# EAGLE board eurocon_board_04 (EAGLE 8.0.0)
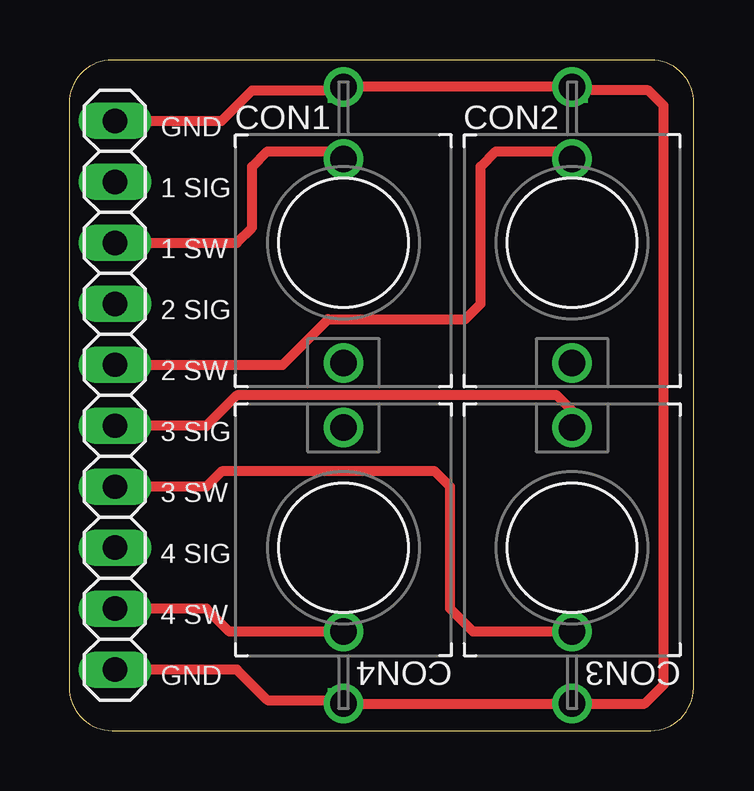
[diagram p0: board, top side]
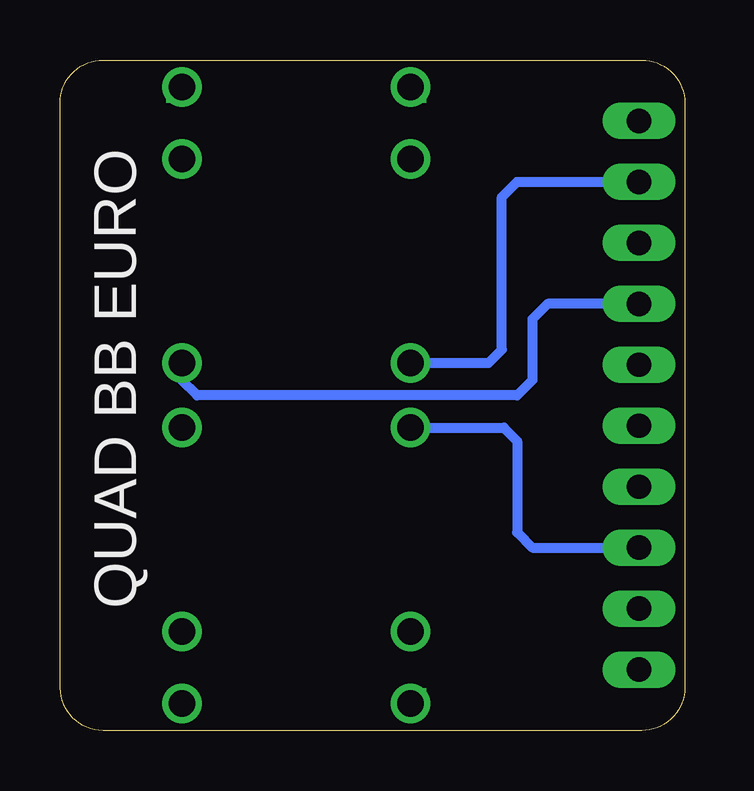
[diagram p1: board, bottom side, seen from below]

Size 26.03 x 27.94 mm. Coordinates in mm from the lower left corner, seen from the top.
Outline: 0,26.14 0,1.8 arc90 1.8,0 24.23,0 arc90 26.02,1.78 26.03,26.14 arc90 24.24,27.94 1.8,27.94 arc90 0,26.14
Copper layers (1*16): Top 0.035mm / dielectric 1.5mm / Bottom 0.035mm
Design rules "default": minimum track width 10mil, minimum drill 24mil, track to track 8mil, track to pad 8mil, pad to pad 8mil, via to via 8mil, smd to smd 8mil, copper to edge 40mil, drill to drill 8mil, minimum pad ring 10mil, minimum via ring 8mil, stop-mask expansion 4mil, vias tented up to drill 0mil, thermal gap 10mil

## Footprints (pad centres in the part's own frame; a part is rotated, then mirrored left to right if it is on the bottom)
WQP-PJ301M-12_JACK = drill 1.1: P$1_TIP 0,5; P$2_SWITCH 0,-3.5; P$3_SLEEVE 0,-6.5
1X10 = drill 1.016 long: 1 -11.43,0; 2 -8.89,0; 3 -6.35,0; 4 -3.81,0; 5 -1.27,0; 6 1.27,0; 7 3.81,0; 8 6.35,0; 9 8.89,0; 10 11.43,0

## Placement (x,y rotation side)
CON1  THONKICONNNEW  [WQP-PJ301M-12_JACK]  11.43,20.32 180 top
CON2  THONKICONNNEW  [WQP-PJ301M-12_JACK]  20.96,20.32 180 top
CON3  THONKICONNNEW  [WQP-PJ301M-12_JACK]  20.96,7.62 0 top
CON4  THONKICONNNEW  [WQP-PJ301M-12_JACK]  11.43,7.62 0 top
JP1  [1X10]  1.91,13.97 270 top

## Library data of the parts
CON1-CON4 = MusicThingModular
JP1 = pinhead

## Nets
GND: CON1.P$3_SLEEVE CON2.P$3_SLEEVE CON3.P$3_SLEEVE CON4.P$3_SLEEVE JP1.1 JP1.10
N$1: CON1.P$1_TIP JP1.2
N$2: CON1.P$2_SWITCH JP1.3
N$3: CON2.P$1_TIP JP1.4
N$4: CON2.P$2_SWITCH JP1.5
N$5: CON3.P$1_TIP JP1.6
N$6: CON3.P$2_SWITCH JP1.7
N$7: CON4.P$1_TIP JP1.8
N$8: CON4.P$2_SWITCH JP1.9

## Tracks (layer width: path | path; a pad name or v marks a point on that pad's centre or on a via)
GND  (via drill 0.6)
  Top 0.406: v11.28,1.27 8.26,1.27 6.98,2.54 JP1.10 | CON4.P$3_SLEEVE CON3.P$3_SLEEVE 23.98,1.12 24.77,1.91 24.77,26.03 24.13,26.67 v21.11,26.67 | v11.28,26.67 7.62,26.67 6.35,25.4 JP1.1 | CON2.P$3_SLEEVE CON1.P$3_SLEEVE
  Bottom 0.406: v11.28,1.27 CON4.P$3_SLEEVE | v11.28,26.67 CON1.P$3_SLEEVE | v21.11,26.67 CON2.P$3_SLEEVE
N$1
  Bottom 0.406: CON1.P$1_TIP 8.18,15.32 7.62,15.88 7.62,22.22 6.98,22.86 JP1.2
N$2
  Top 0.406: JP1.3 6.98,20.32 7.62,20.95 7.62,23.49 8.26,24.13 11.12,24.13 CON1.P$2_SWITCH
N$3
  Bottom 0.406: JP1.4 5.71,17.78 6.35,17.14 6.35,14.6 6.98,13.97 20.32,13.97 20.96,14.6 CON2.P$1_TIP
N$4
  Top 0.406: JP1.5 8.89,15.24 10.79,17.14 16.51,17.14 17.15,17.78 17.15,23.49 17.78,24.13 20.65,24.13 CON2.P$2_SWITCH
N$5
  Top 0.406: CON3.P$1_TIP 20.96,13.33 20.32,13.97 6.98,13.97 5.71,12.7 JP1.6
N$6
  Top 0.406: CON3.P$2_SWITCH 16.84,4.12 15.88,5.08 15.88,10.16 15.24,10.8 6.35,10.8 5.71,10.16 JP1.7
N$7
  Bottom 0.406: CON4.P$1_TIP 7.54,12.62 6.98,12.06 6.98,8.25 6.35,7.62 JP1.8
N$8
  Top 0.406: CON4.P$2_SWITCH 6.67,4.12 5.71,5.08 JP1.9

## Text on the board
tNames: GND | 1 SIG | 1 SW | 2 SIG | 2 SW | 3 SIG | 3 SW | 4 SIG | 4 SW | GND
bNames: QUAD BB EURO